# Altium PCB SOT343_RF_BJT.PcbDoc
Units mm, origin at the board's own origin, x right, y up, seen from the top; angles counter-clockwise.
Board outline 27.41 x 27.89 mm, 4 copper layers (Top Layer, Layer 1, Layer 2, Bottom Layer), stack 0.603 mm thick; 11 components, 7 nets, 28 pads, 90 vias.
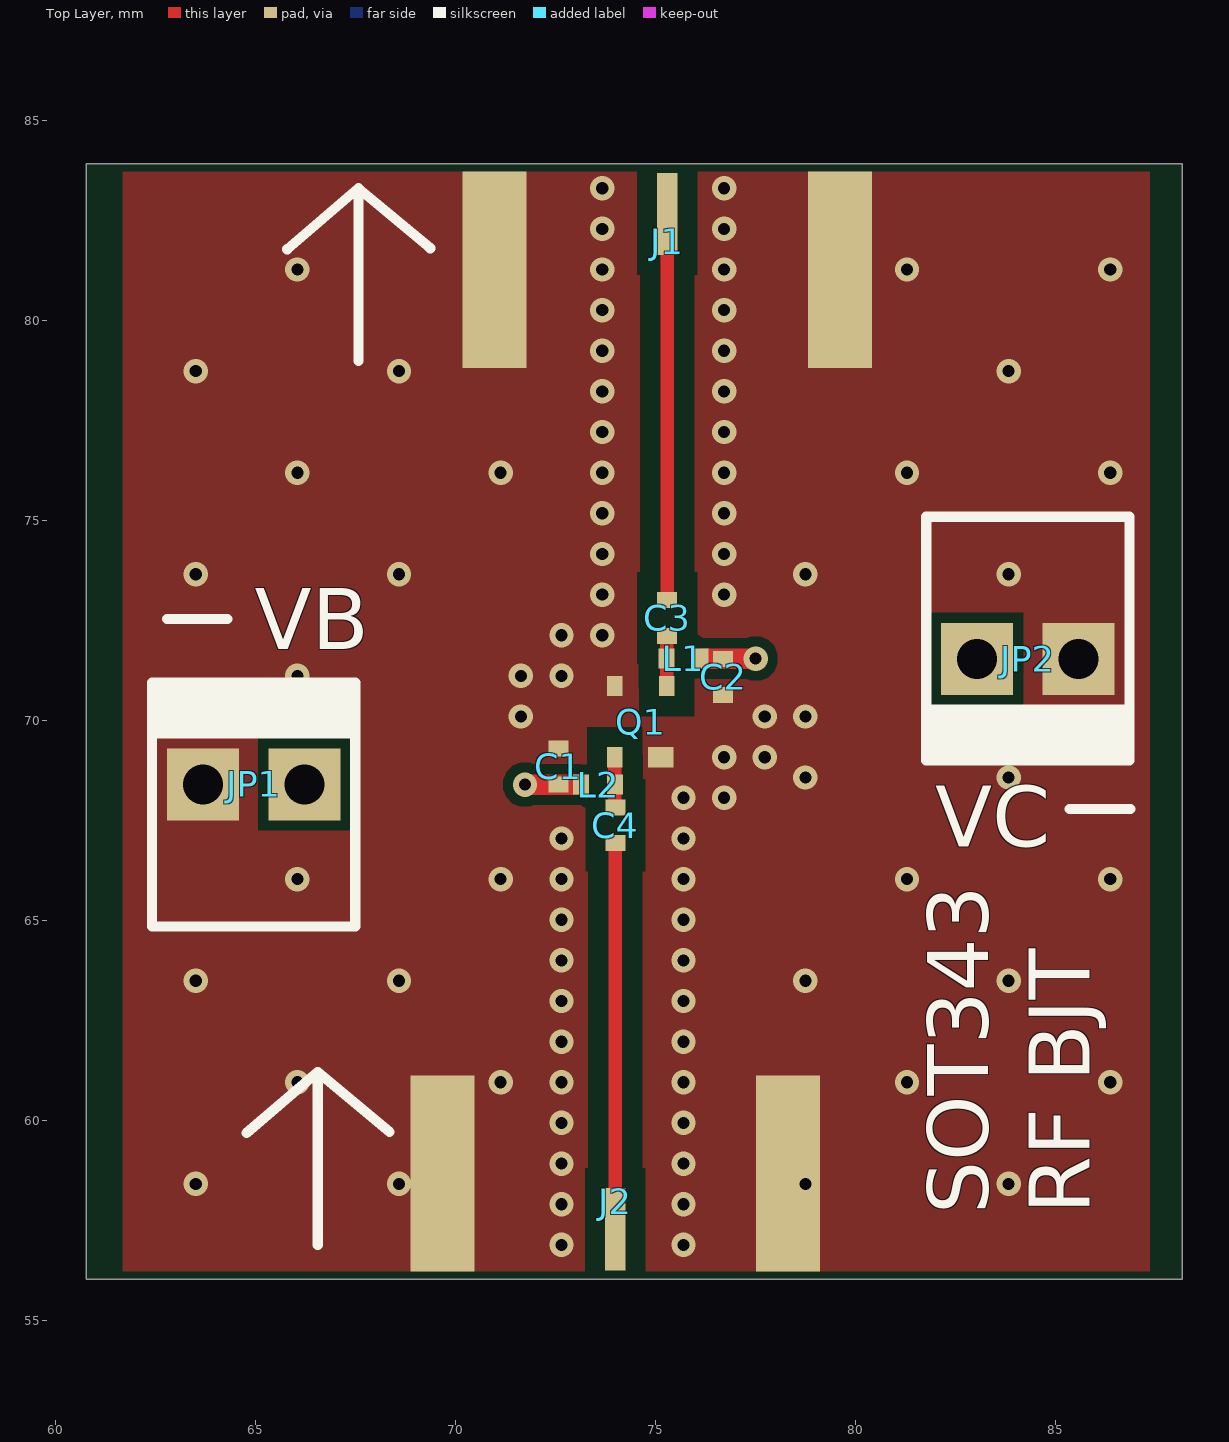
[diagram p0: Top Layer view]
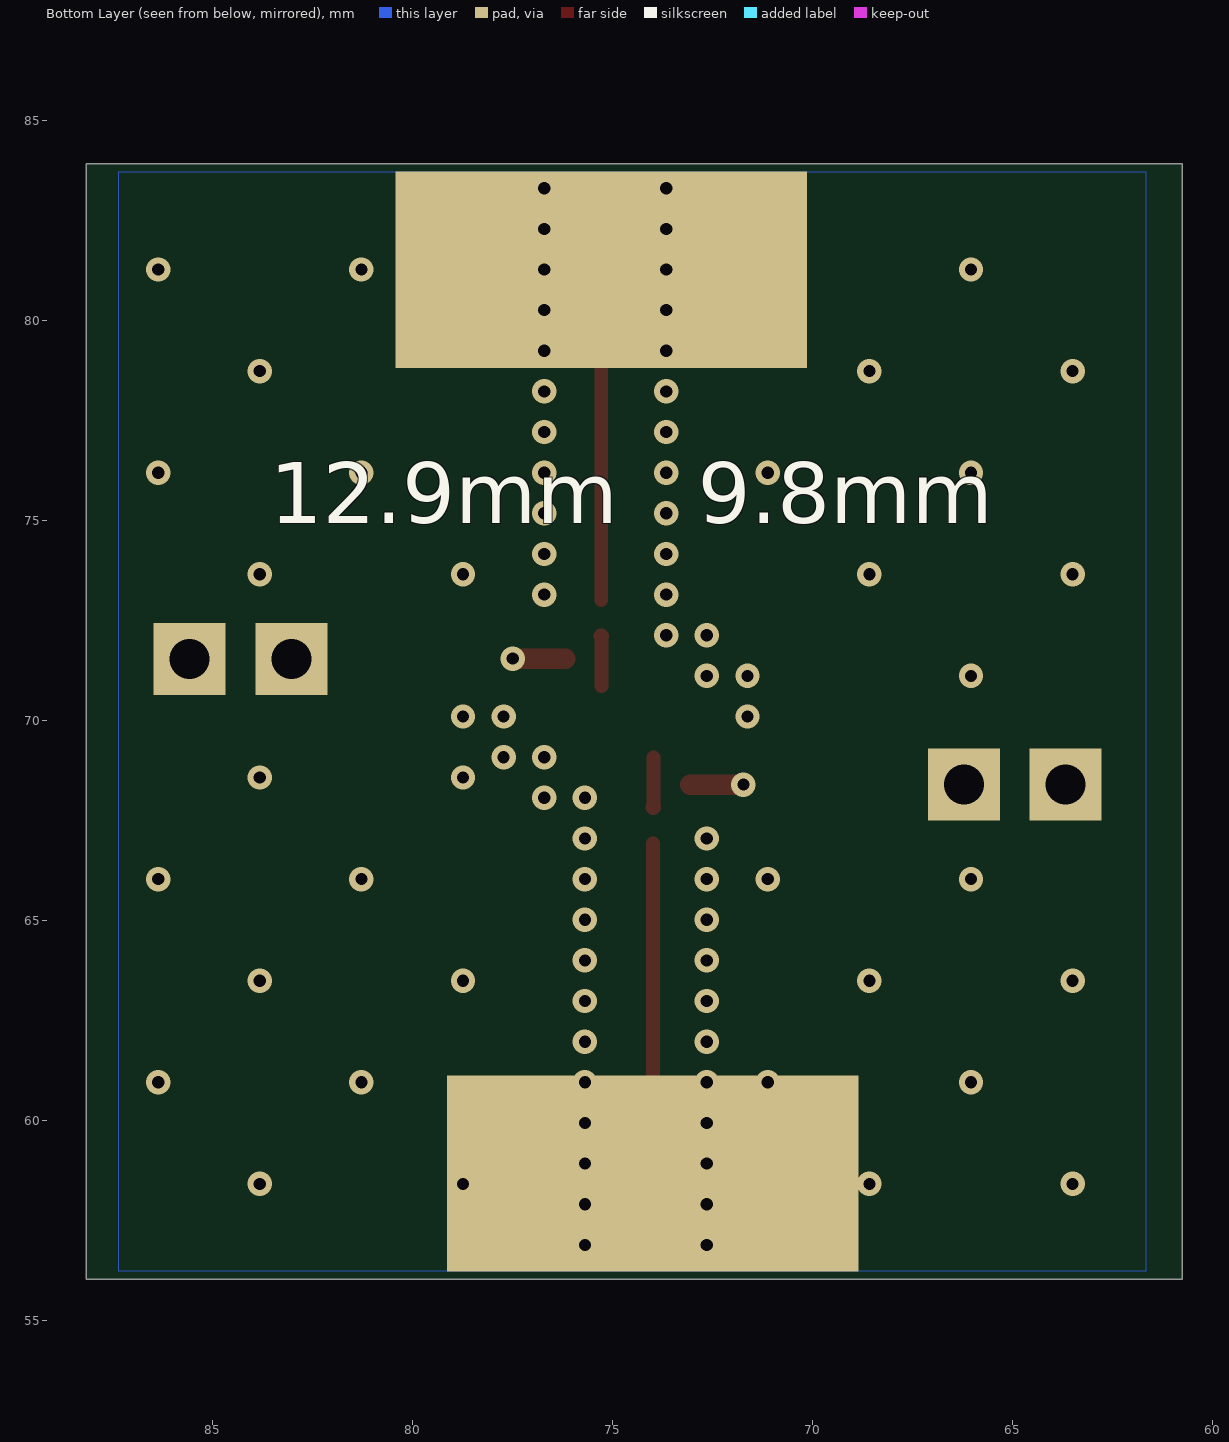
[diagram p1: Bottom Layer view, seen from below]
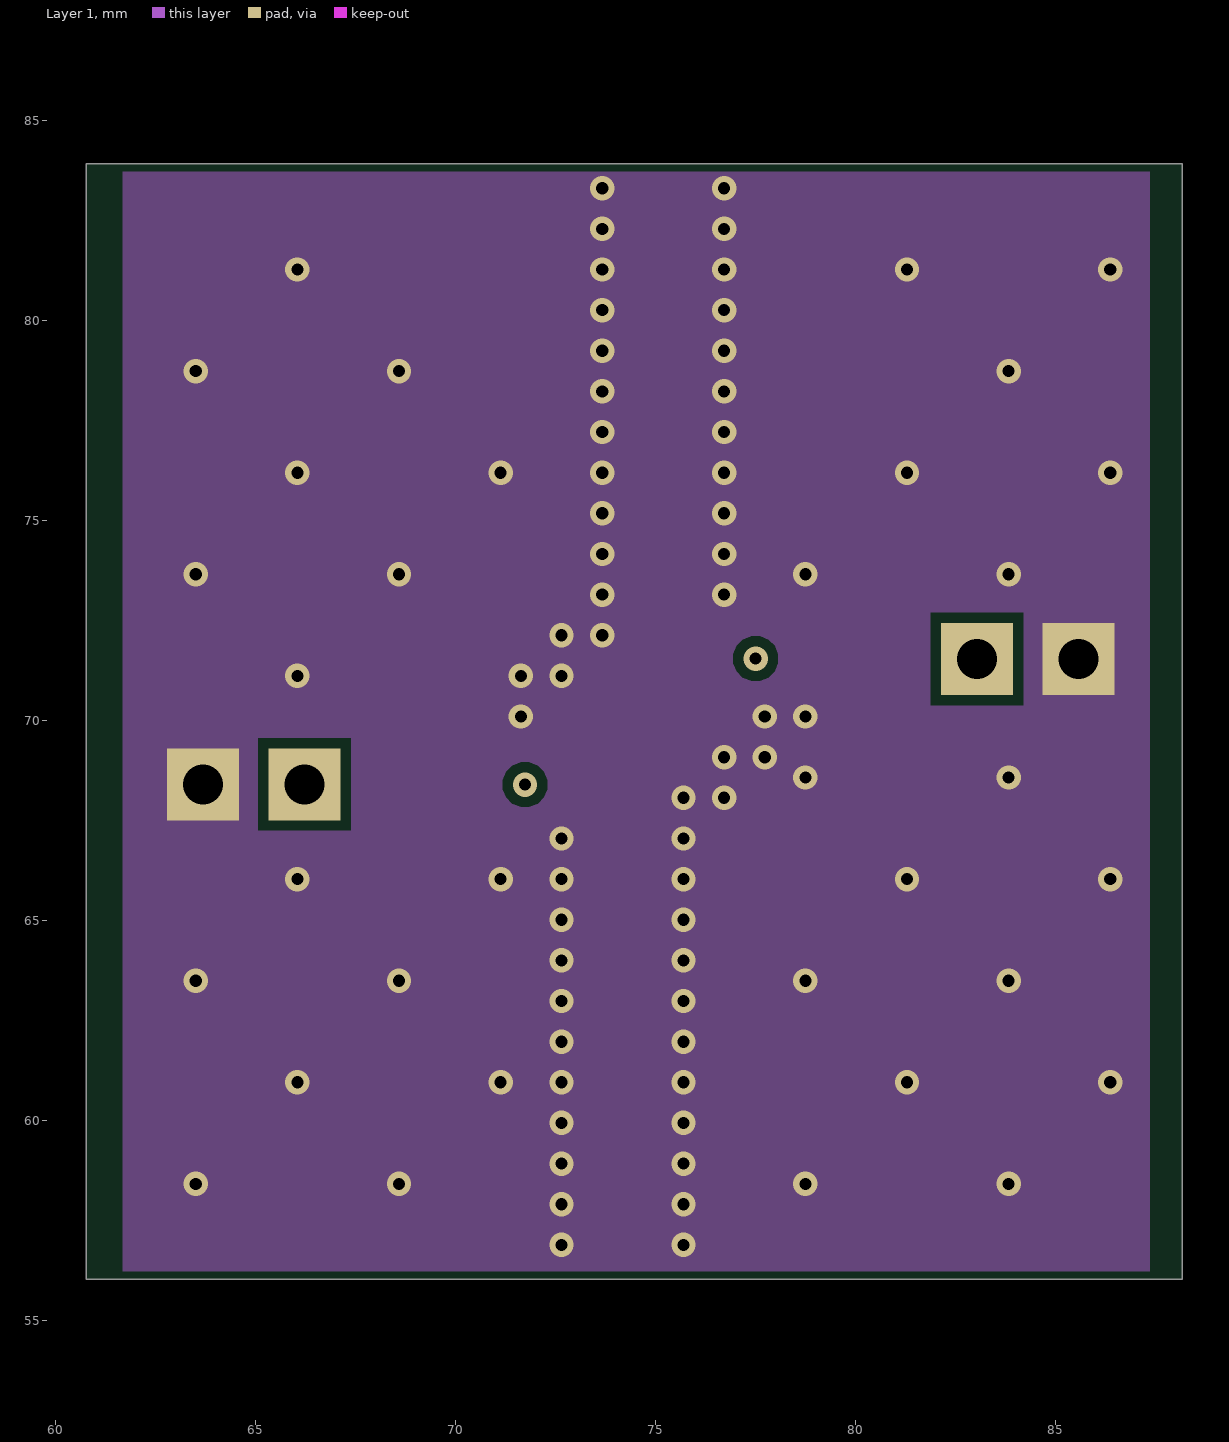
[diagram p2: Layer 1]
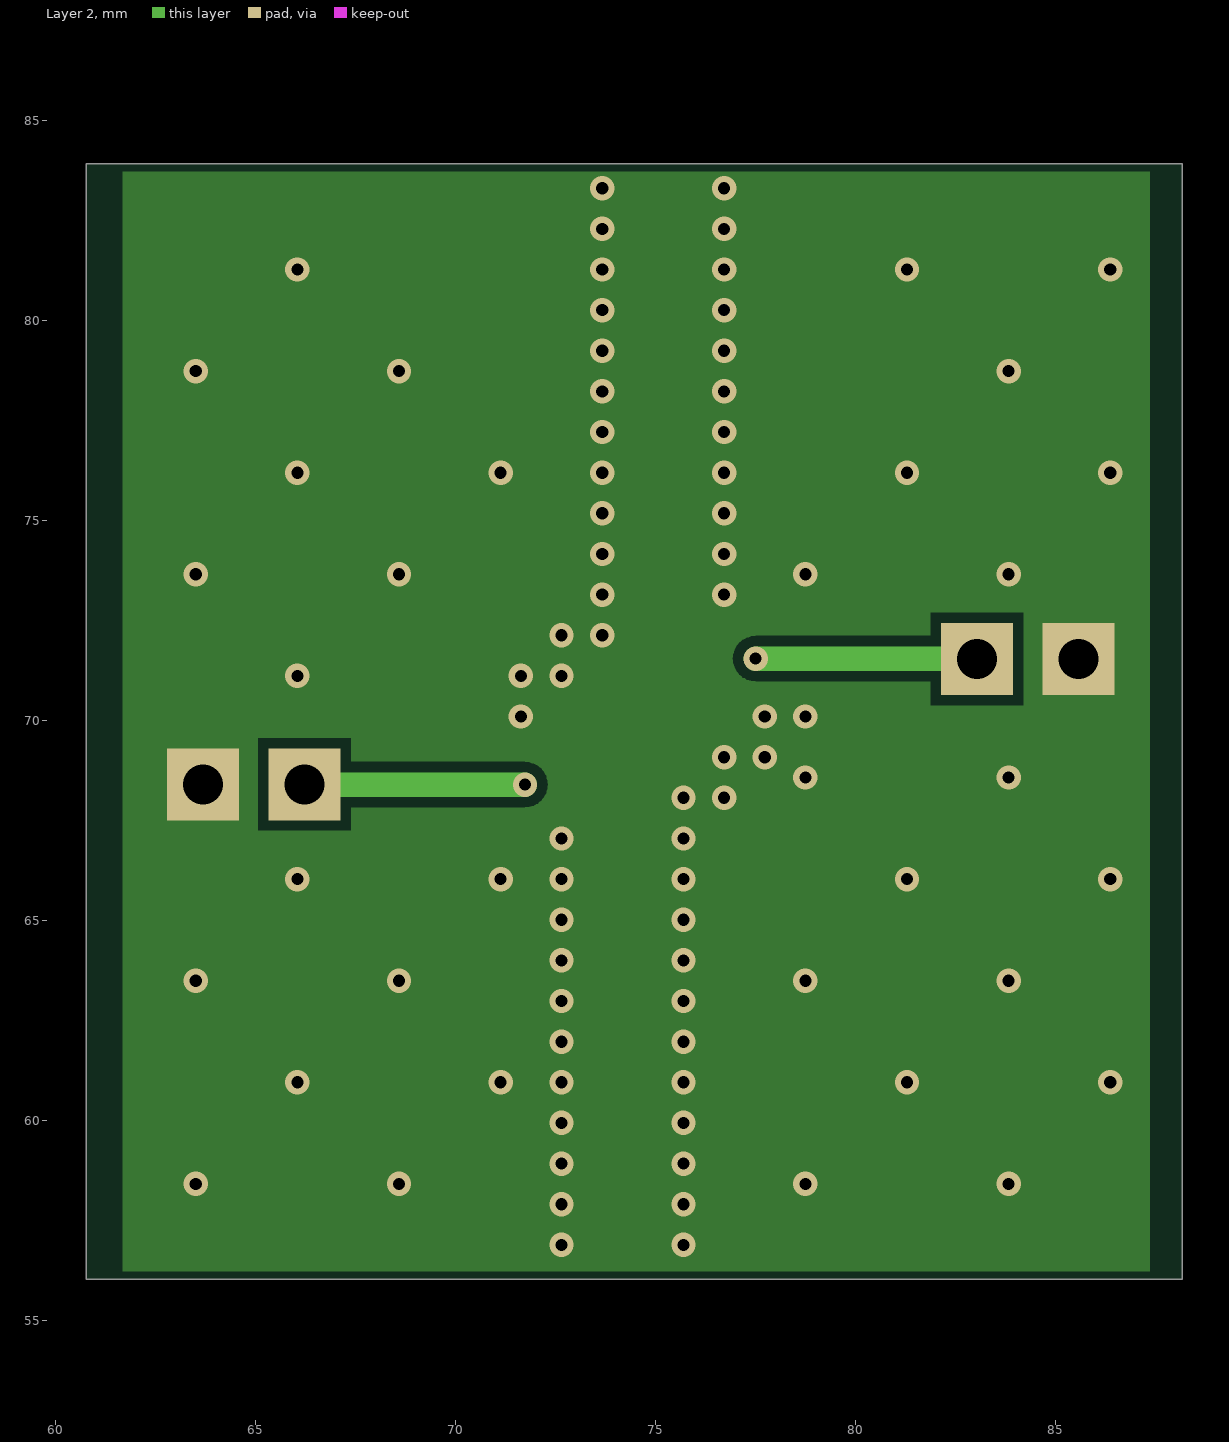
[diagram p3: Layer 2]
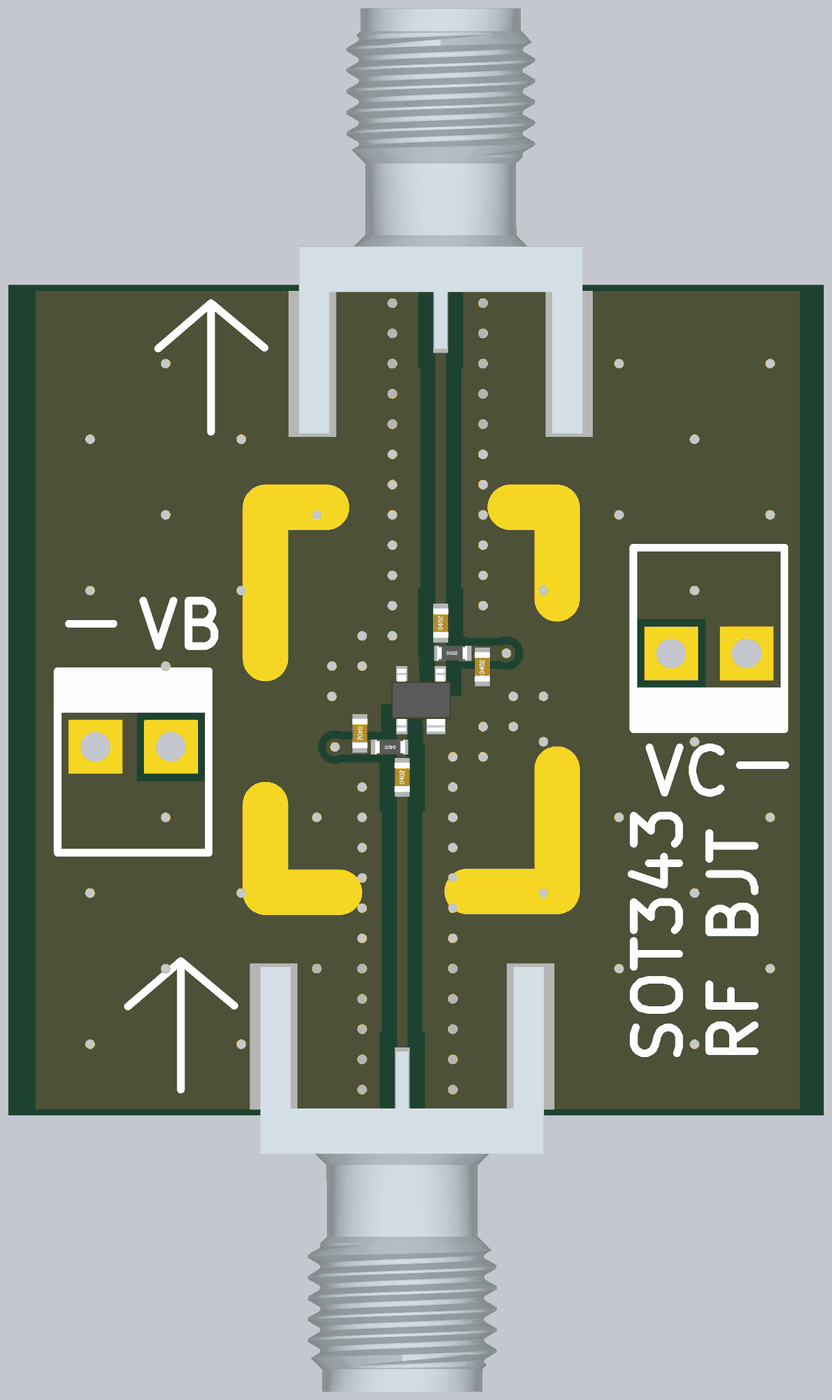
[diagram p4: 3D render of the assembled board from above, using the file's embedded part models]

## Layer stack, top to bottom
Top Solder: solder mask 0.0102, Solder Resist, Dk 3.5
Top Layer: signal copper 0.0356
Dielectric 2: prepreg 0.0711, PP-006, Dk 4.1
Layer 1: signal copper 0.035
Dielectric 1: dielectric 0.32, FR-4, Dk 4.8
Layer 2: signal copper 0.035
Dielectric 3: prepreg 0.0711, PP-006, Dk 4.1
Bottom Layer: signal copper 0.0356
Bottom Solder: solder mask 0.0102, Solder Resist, Dk 3.5

## Board outline
60.757,56.032 60.757,83.922 88.163,83.922 88.163,56.032

## Design rules (kind name [scope] priority, off if disabled: settings)
Clearance CTRL [InNetClass('Ctrl') vs InNet('GND')] p1: gap=0.508 ignorepadtopadclearanceinfootprint=TRUE
Clearance Clearance_1 [All] p2: gap=0.254 ignorepadtopadclearanceinfootprint=TRUE
PlaneConnect [All] p1: planeconnectstyle=Direct reliefexpansion=0.508 reliefentries=4 reliefconductorwidth=0.254 reliefairgap=0.254
PolygonConnect [All] p1: connectstyle=Direct reliefconductorwidth=0.254 reliefentries=4 polygonreliefangle="90 Angle" airgapwidth=0.254
RoutingVias [All] p1: holewidth=0.711 width=1.27 viastyle="Through Hole" minholewidth=0.711 minwidth=1.27 maxholewidth=0.711 maxwidth=1.27
SolderMaskExpansion [All] p1: expansion=0.102 istentingtop=FALSE
Width [All] p1: maxlimit=1.016 minlimit=0.254 preferedwidth=0.254
29 further rules are at their usual default settings.

## Classes and differential pairs
net class Ctrl: NetC3_1 NetC3_2 NetC4_1 NetC4_2

## Components (designator, comment, footprint, x,y, rotation, side; value= is the part's Value field where it differs from the comment)
C1 "104" "C 0402_L" 72.568,68.859 r270 top
C2 "104" "C 0402_L" 76.683,71.095 r90 top
C3 "104" "C 0402_L" 75.286,72.568 r90 top
C4 "104" "C 0402_L" 73.99,67.386 r90 top
J1 "132414" CONN_132414_AMP 75.286,86.353 r0 top
J2 "132414" CONN_132414_AMP 73.99,53.601 r180 top
JP1 "HDR-1X2" KF2510-LI-2P 64.948,68.409 r0 top
JP2 "HDR-1X2" KF2510-LI-2P 84.303,71.545 r180 top
L1 "" "R 0402_L" 75.667,71.552 r0 top
L2 "" "R 0402_L" 73.584,68.402 r180 top
Q1 "NPN" SOT343 74.625,69.977 r0 top

## Footprints (in the part's own frame and the unit in brackets; to place one, negate y for a bottom-side part, rotate by r counter-clockwise, add the part's x,y. Pads: shape width x height; smd on the part's side, far side on the other; paste and mask are expansions set on the pad)
"C 0402_L" [mm] "无极性贴片电容"
  rect 0.4x0.5 smd mask+0: 1(-0.45,0) 2(0.45,0)
  body extent -0.5,-0.26 0.5,0.26, height 0.53
CONN_132414_AMP [mil]
  rect 20x81 smd paste+0 mask+0: 1(0,-145)
  rect 63x193 smd mask+0: 2(-170,-200) 3(170,-200)
  rect 405x193 smd far side mask+0: 4(0,-200)
  body extent -188,-292 188,270, height 162
KF2510-LI-2P [mm] "接插件/2A"
  rect 1.8x1.8 hole 1 mask+0: 1(-1.27,0) 2(1.27,0)
  silkscreen extent -2.59,-3.56 2.54,2.54, body extent -2.54,-3.5 2.54,2.4, height 11.05
"R 0402_L" [mm] "1/16W贴片电阻 https://item.taobao.com/item.htm?ft=t&id=613637044352"
  rect 0.4x0.5 smd mask+0: 1(-0.4,0) 2(0.45,0)
  body extent -0.5,-0.25 0.5,0.25, height 0.3
SOT343 [mil]
  rect 15x20 smd mask+0: 1(-25.59,35) 2(-25.59,-35) 3(25.59,35)
  rect 25x20 smd mask+0: 1(19.69,-35)
  body extent -39,-41 39,41, height 39

## Part data
C1 C2 C3 C4: library part C, "贴片电容", BOM名称=贴片电容, 下单链接=https://item.taobao.com/item.htm?ft=t&id=613637044352, 淘宝ID=小糖豆的小窝窝
J1 J2: "No Description Available", Mfr_Name="Amphenol ICC", Copyright="Copyright (C) 2022 Ultra Librarian. All rights reserved.", Manufacturer_Part_Number=132414, RefDes=RefDes, Type=DEV
JP1 JP2: library part "Header 2", "2P接插件", BOM名称=2P接插件, 下单链接=https://item.taobao.com/item.htm?ft=t&id=613637044352, 淘宝ID=小糖豆的小窝窝
L1 L2: library part L-Wire, "高频绕线电感"
Q1: library part 2N-NPN, "NPN型三极管", BOM名称=NPN型三极管, 下单链接=https://item.taobao.com/item.htm?ft=t&id=613637044352, 淘宝ID=小糖豆的小窝窝

## Via types
v1: diameter 0.61, hole 0.305, Top Layer to Bottom Layer, tented both sides, 90 vias

## Nets (pads, with @x,y where several pads share a name; then routed paths per layer and width w, separated by ;. In a path a pad name is that pad's centre, name@x,y a point inside that pad or via, vN(x,y) a via of type N, cw(c..) or ccw(c..) an arc to the next point about the centre after c; other vN are vias at no path point)
GND: C1.1 C2.1 J1.2 J1.3 J1.4 J2.2 J2.3 J2.4 JP1.1 JP2.1 Q1.1
  other v1: 72.644,56.896 75.692,56.896 72.644,57.912 75.692,57.912 63.5,58.42 68.58,58.42 78.74,58.42 83.82,58.42 72.644,58.928 75.692,58.928 72.644,59.944 75.692,59.944 66.04,60.96 71.12,60.96 72.644,60.96 75.692,60.96 81.28,60.96 86.36,60.96 72.644,61.976 75.692,61.976 72.644,62.992 75.692,62.992 63.5,63.5 68.58,63.5 78.74,63.5 83.82,63.5 72.644,64.008 75.692,64.008 72.644,65.024 75.692,65.024 66.04,66.04 71.12,66.04 72.644,66.04 75.692,66.04 81.28,66.04 86.36,66.04 72.644,67.056 75.692,67.056 75.692,68.072 76.708,68.072 78.74,68.58 83.82,68.58 76.708,69.088 77.724,69.088 71.628,70.104 77.724,70.104 78.74,70.104 66.04,71.12 71.628,71.12 72.644,71.12 72.644,72.136 73.66,72.136 73.66,73.152 76.708,73.152 63.5,73.66 68.58,73.66 78.74,73.66 83.82,73.66 73.66,74.168 76.708,74.168 73.66,75.184 76.708,75.184 66.04,76.2 71.12,76.2 73.66,76.2 76.708,76.2 81.28,76.2 86.36,76.2 73.66,77.216 76.708,77.216 73.66,78.232 76.708,78.232 63.5,78.74 68.58,78.74 83.82,78.74 73.66,79.248 76.708,79.248 73.66,80.264 76.708,80.264 66.04,81.28 73.66,81.28 76.708,81.28 81.28,81.28 86.36,81.28 73.66,82.296 76.708,82.296 73.66,83.312 76.708,83.312
NetC3_1: C3.1 L1.1 Q1.3 | length 1.3
  Top Layer w0.342: Q1.3 C3.1@75.275,72.118
  Top Layer w0.381: C3.1@75.275,72.118 C3.1
NetC3_2: C3.2 J1.1 | length 9.7
  Top Layer w0.342: C3.2 J1.1
NetC4_1: C4.1 J2.1 | length 9.7
  Top Layer w0.342: J2.1 C4.1
NetC4_2: C4.2 L2.1 Q1.2 | length 1.3
  Top Layer w0.342: C4.2@73.975,67.836 Q1.2
  Top Layer w0.381: C4.2@73.975,67.836 C4.2
VB: C1.2 JP1.2 L2.2 | length 6.8
  Top Layer w0.508: v1(71.73,68.402) L2.2@73.06,68.402
  Layer 2 w0.61: JP1.2@66.225,68.402 v1(71.73,68.402)
VC: C2.2 JP2.2 L1.2 | length 6.9
  Top Layer w0.508: L1.2@76.176,71.552 v1(77.495,71.552)
  Layer 2 w0.61: v1(77.495,71.552) 83.033,71.552 JP2.2

## Polygon pours and split planes (outlines as drawn)
GND on Top Layer "NONET_L-01_P-001" (solid, remove dead copper, pour order 2): 61.671,56.236 87.351,56.236 87.351,83.718 61.671,83.718
GND on Layer 1 "NONET_L-01_P-001" (solid, remove dead copper, pour order 4): 61.671,56.236 87.351,56.236 87.351,83.718 61.671,83.718
GND on Layer 2 "NONET_L-01_P-001" (solid, remove dead copper, pour order 5): 61.671,56.236 87.351,56.236 87.351,83.718 61.671,83.718
no net on Bottom Layer "NONET_L-01_P-001" (solid, remove dead copper, pour order 6): 61.671,56.236 87.351,56.236 87.351,83.718 61.671,83.718

## Silkscreen, mask and mechanical layers (free items; w line width, h text height)
Top Overlay:
  lines w0.254: 62.789,72.542 64.287,72.542 ; 64.77,59.69 66.548,61.214 ; 65.786,81.788 67.564,83.312 ; 66.548,56.896 66.548,61.214 ; 67.564,78.994 67.564,83.312 ; 68.347,59.715 66.548,61.214 ; 69.363,81.813 67.564,83.312 ; 85.344,67.793 86.868,67.793
  text "VB" at 64.973,71.78 h1.52
  text "VC" at 81.991,66.853 h1.52
  text "SOT343" at 83.312,57.658 h1.52 r90
  text "RF BJT" at 85.852,57.658 h1.52 r90
Bottom Overlay:
  text "12.9mm   9.8mm" at 83.566,74.93 h1.52
Top Solder:
  lines w1.524: 69.393,66.472 69.393,63.525 71.882,63.525 ; 69.393,71.374 69.393,76.454 71.45,76.454 ; 76.175,63.551 79.197,63.551 79.197,67.666 ; 77.622,76.454 79.197,76.454 79.197,73.381
Mechanical 1:
  the board outline again, w0.254